# Altium PCB PCB1.PcbDoc (part 1 of 2)
Units mm, origin at the board's own origin, x right, y up, seen from the top; angles counter-clockwise.
Board outline 99.95 x 91.57 mm, 2 copper layers (Top Layer, Bottom Layer); 184 components, 220 nets, 819 pads, 143 vias.
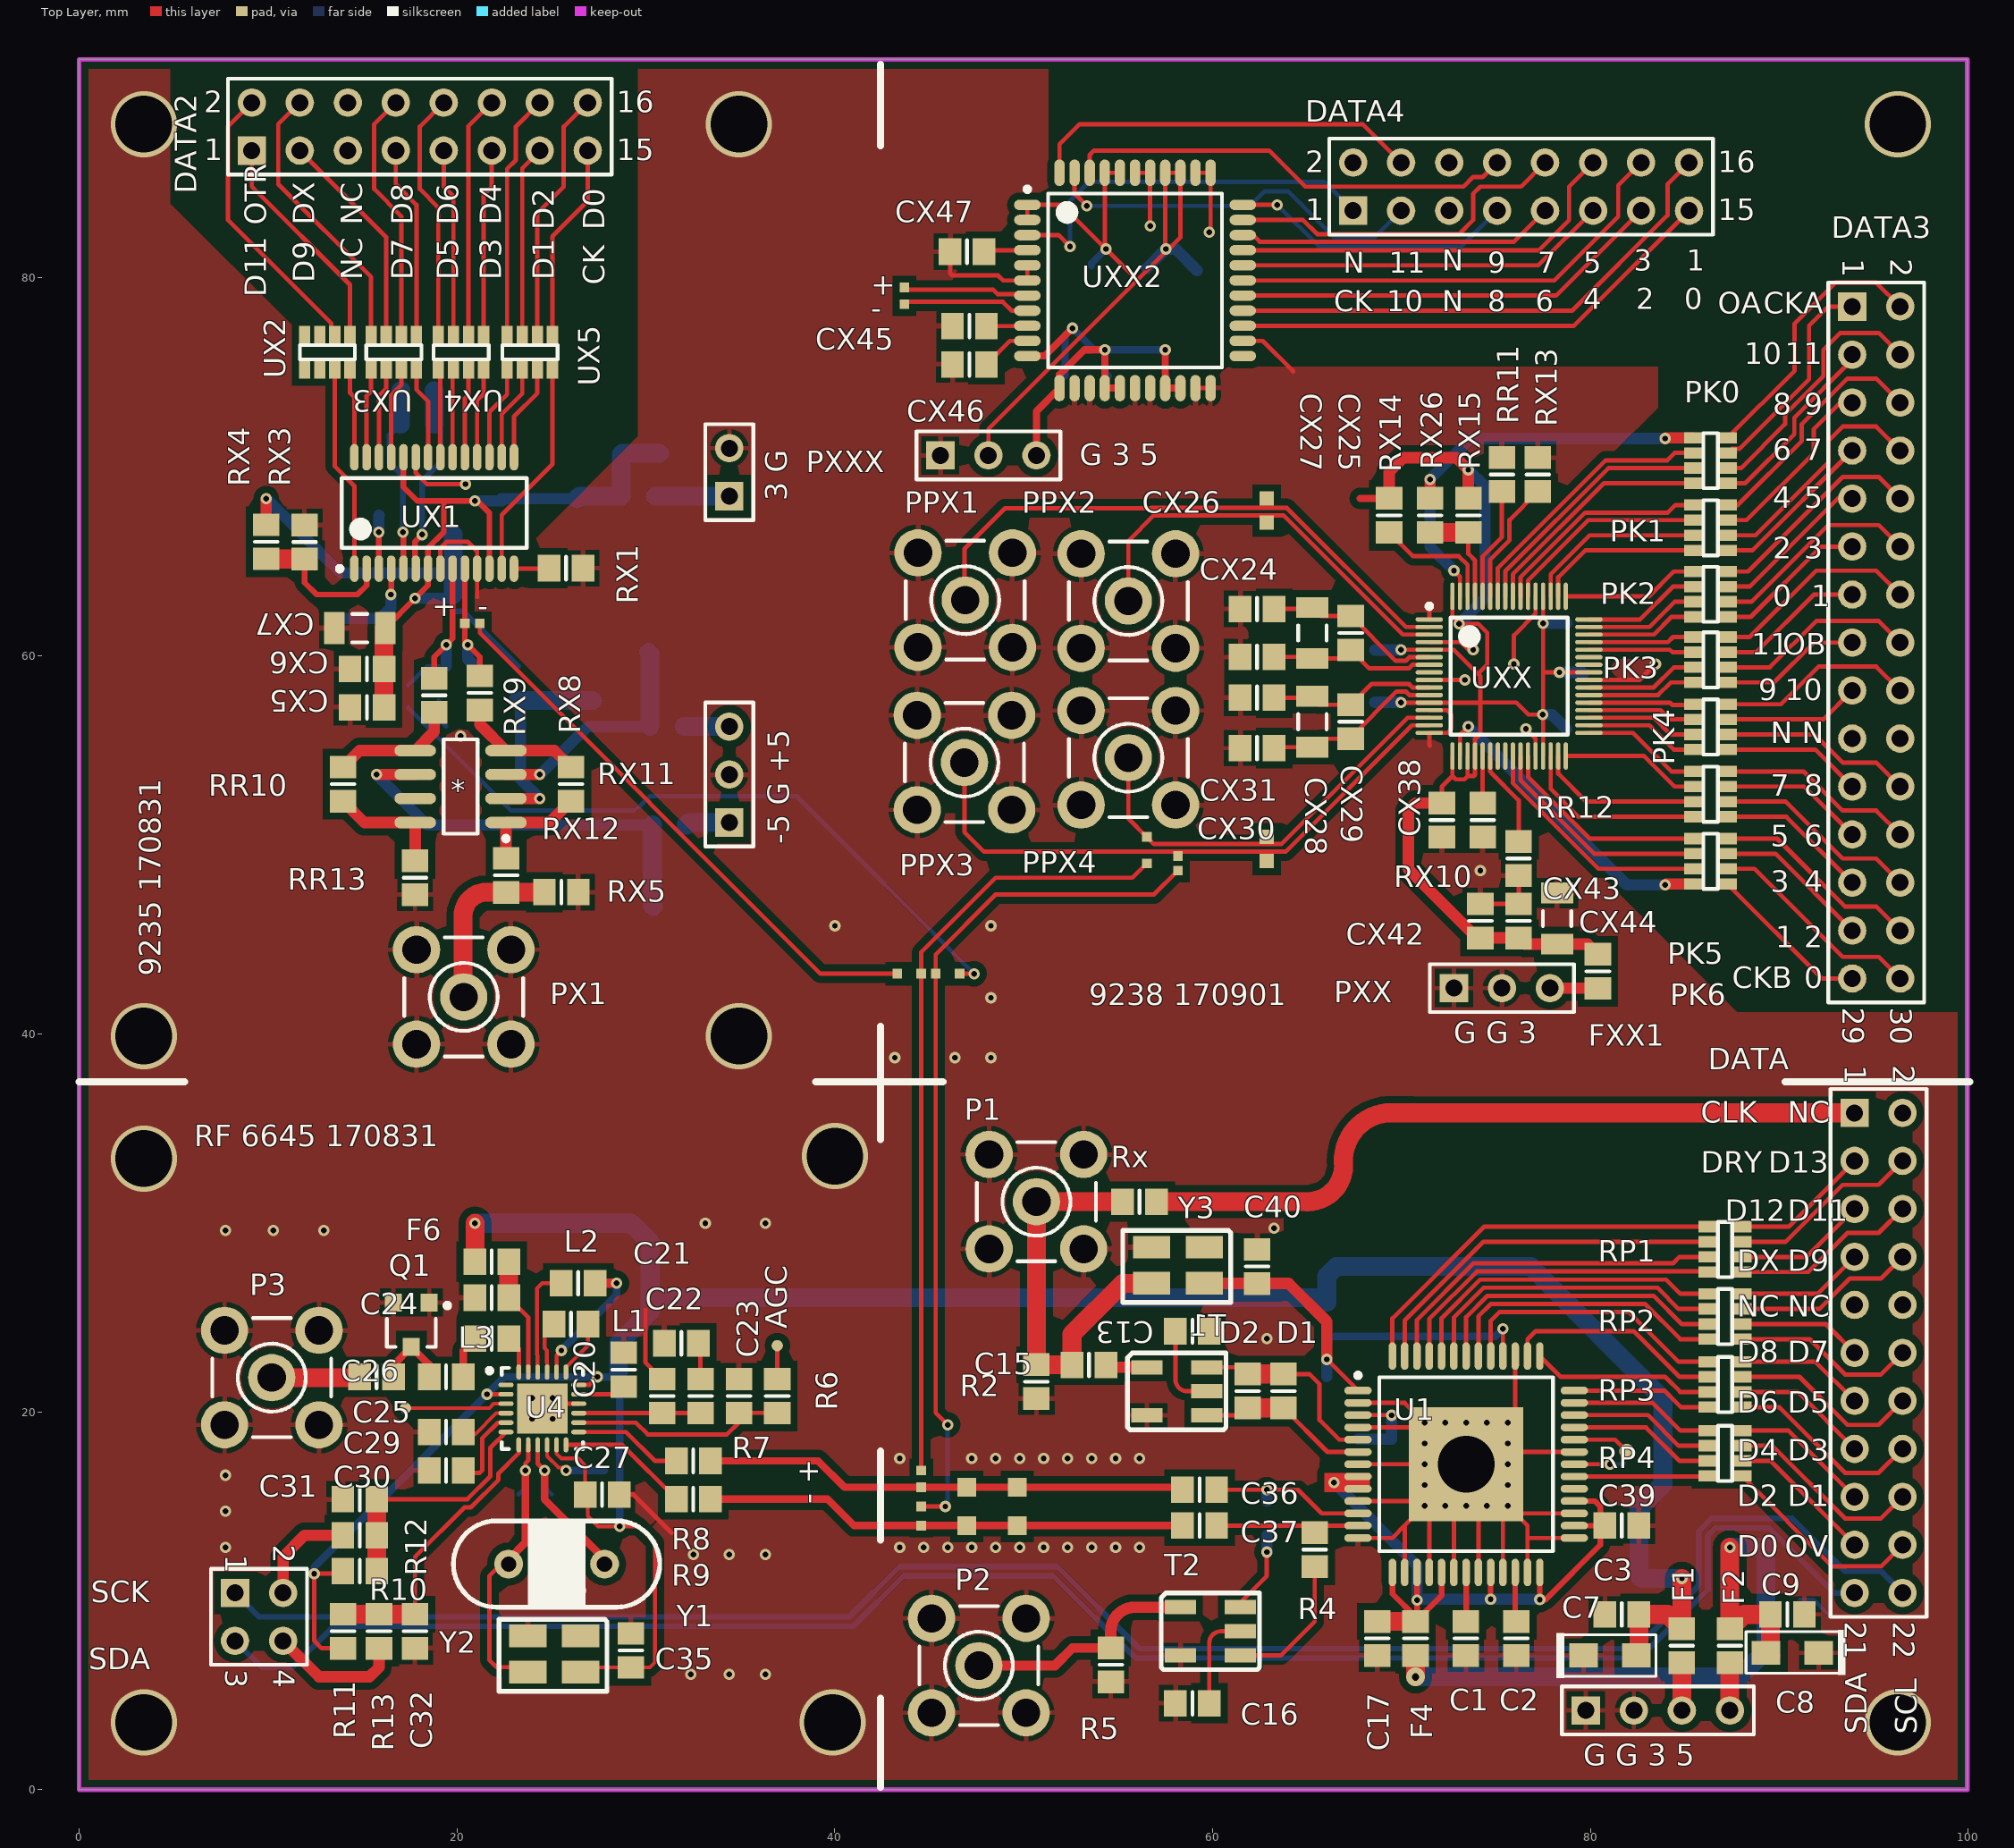
[diagram p0: Top Layer view]
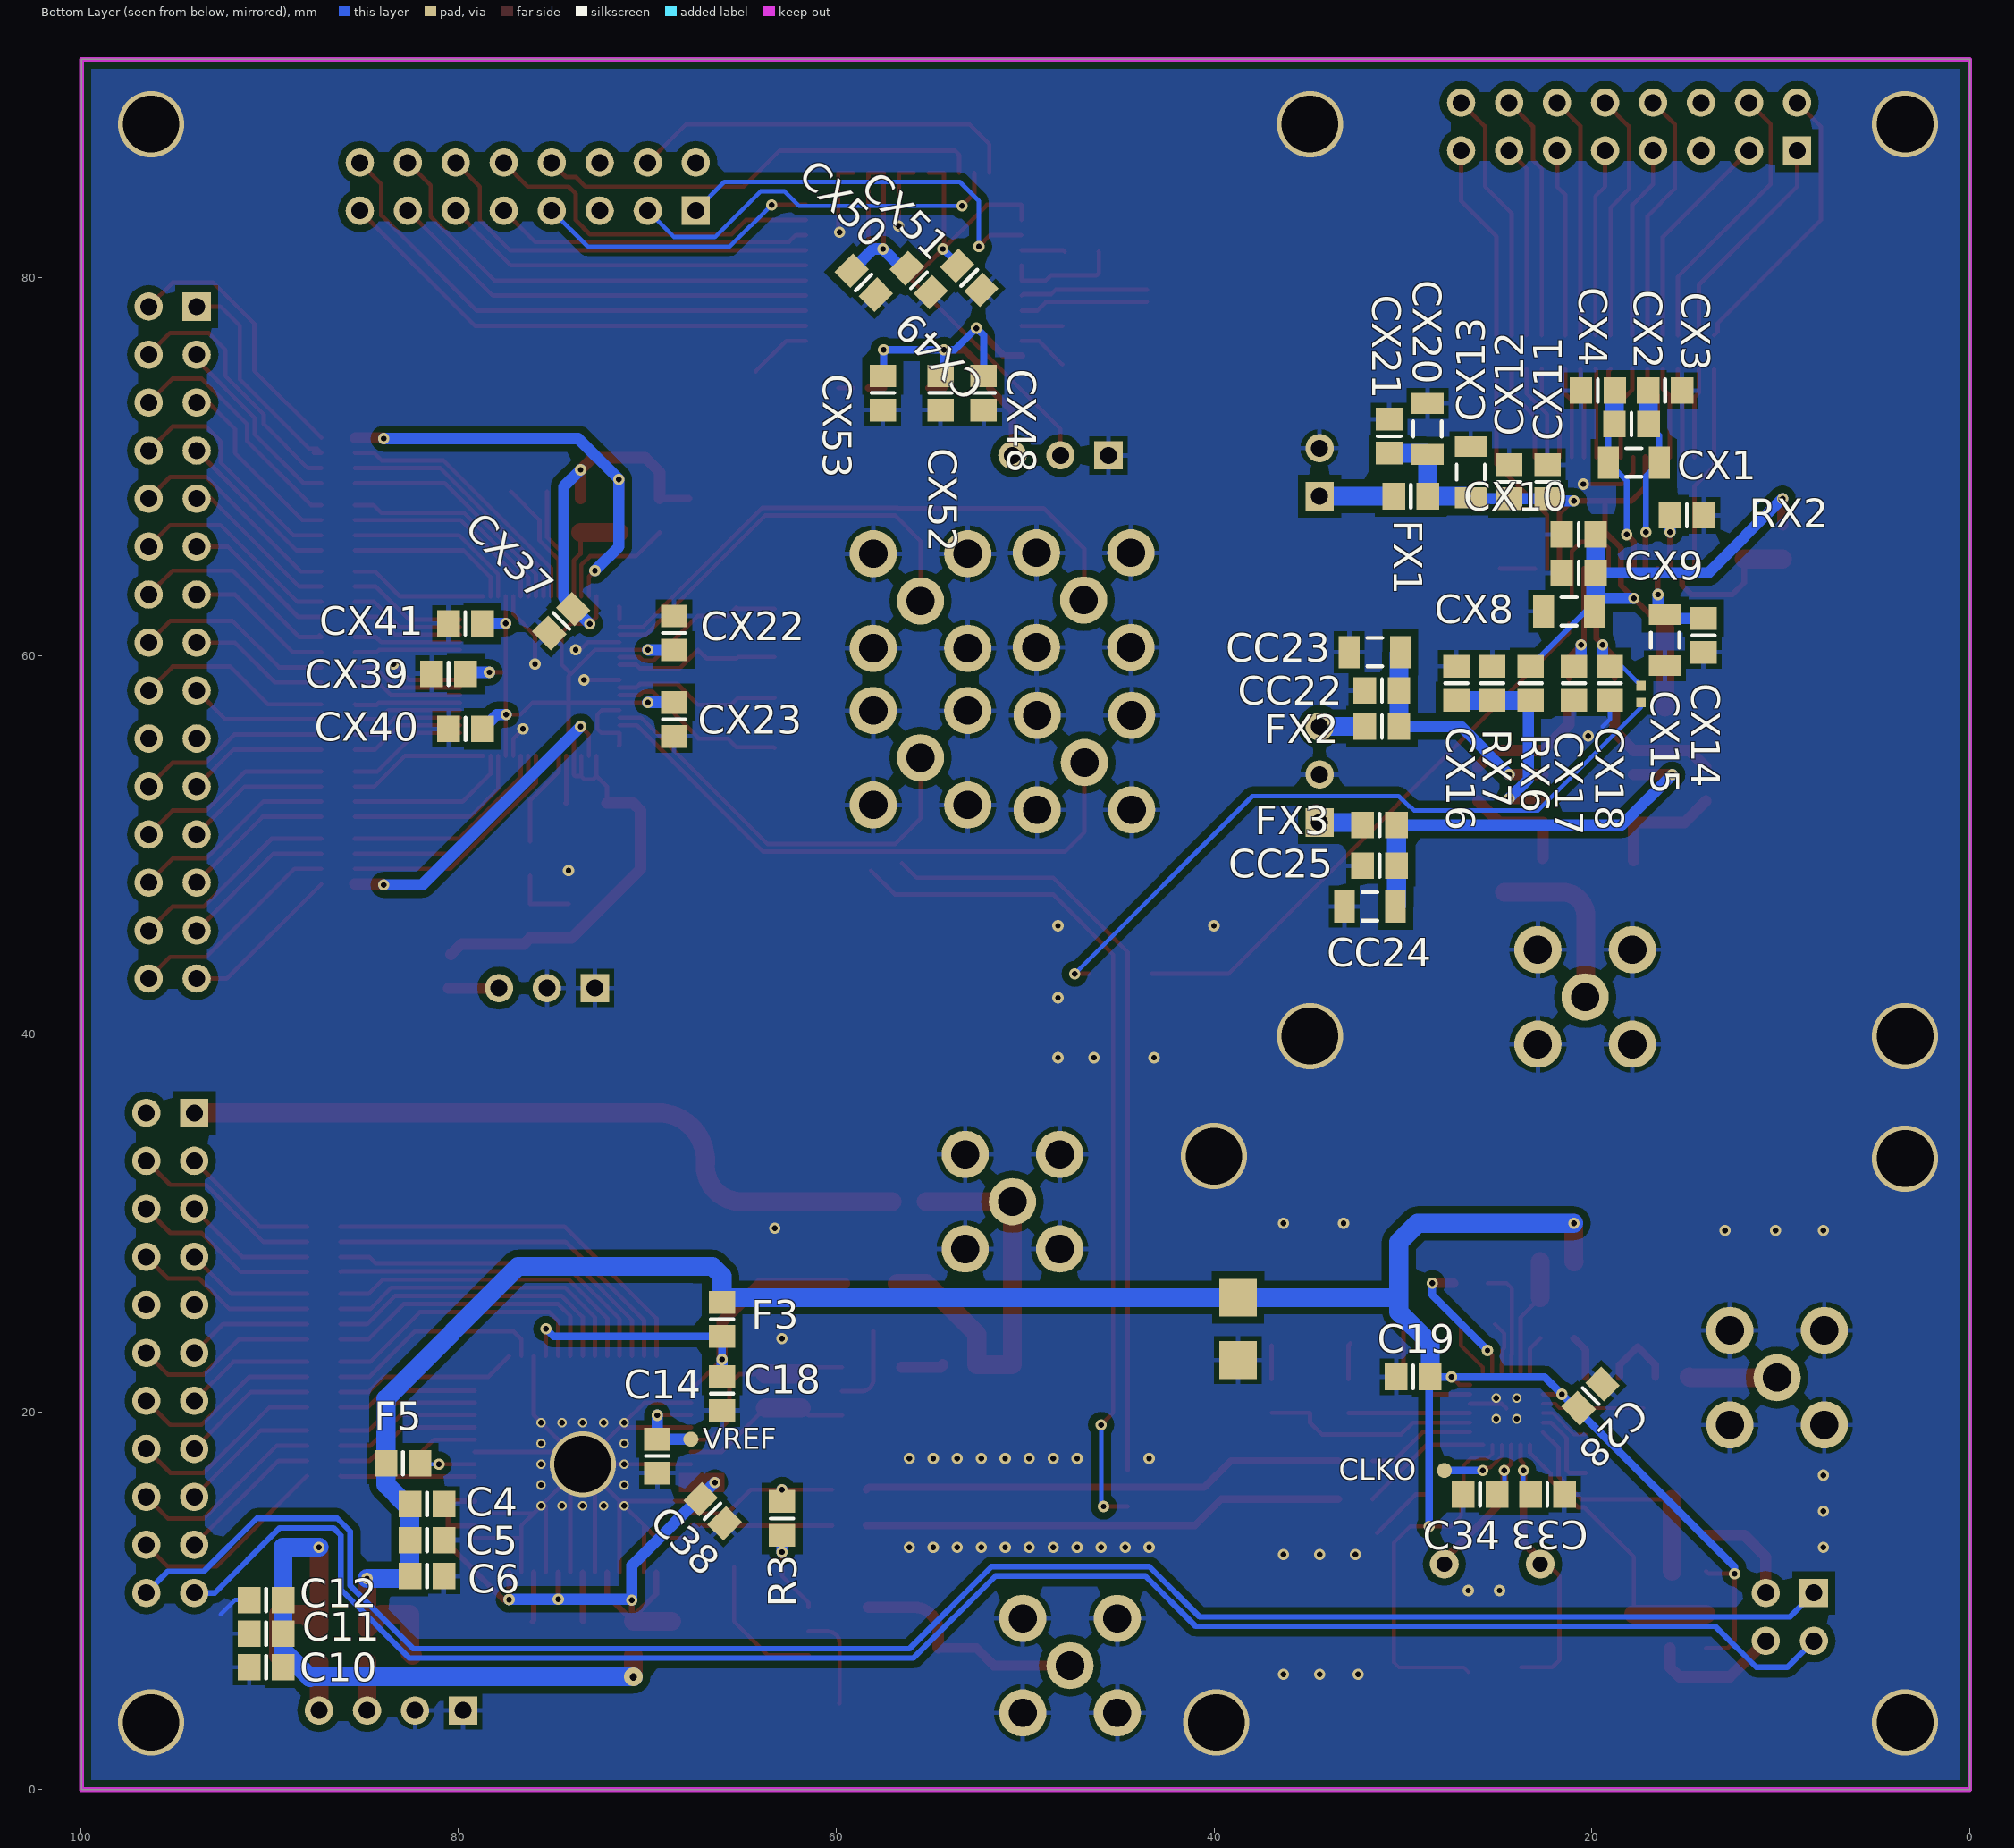
[diagram p1: Bottom Layer view, seen from below]

## Layer stack, top to bottom
Top Solder: solder mask 0.0102, Solder Resist, Dk 3.5
Top Layer: signal copper 0.0356
Dielectric1: dielectric 0.32, FR-4, Dk 4.8
Bottom Layer: signal copper 0.0356
Bottom Solder: solder mask 0.0102, Solder Resist, Dk 3.5

## Board outline
0,0 0,91.567 99.949,91.567 99.949,0

## Design rules (kind name [scope] priority, off if disabled: settings)
Clearance [All] p1: gap=0.17
PlaneConnect [All] p1: planeconnectstyle=Direct reliefexpansion=0.508 reliefentries=4 reliefconductorwidth=0.254 reliefairgap=0.254
PolygonConnect MyRule [IsVia] p1: connectstyle=Direct reliefconductorwidth=0.254 reliefentries=4 polygonreliefangle="90 Angle" airgapwidth=0.254
PolygonConnect PolygonConnect_1 [All] p2: connectstyle=Relief reliefconductorwidth=0.254 reliefentries=4 polygonreliefangle="90 Angle" airgapwidth=0.254
RoutingVias [All] p1: holewidth=0.711 width=1.27 viastyle="Through Hole" minholewidth=0.711 minwidth=1.27 maxholewidth=0.711 maxwidth=1.27
SolderMaskExpansion [All] p1: expansion=0.102
Width [All] p1: maxlimit=2 minlimit=0.17 preferedwidth=0.254 minimp=50.000000 maximp=50.000000 favimp=50.000000
29 further rules are at their usual default settings.

## Classes and differential pairs
component class Sheet1: C1 C2 C3 C4 C5 C6 C7 C8 C9 C10 C11 C12 C13 C14 C15 C16 C17 C18 C19 C20 C21 C22 C23 C24 C25 C26 C27 C28 C29 C30 C31 C32 C33 C34 C35 C36 C37 C38 C39 C40 D1 D2 DATA F1 F2 F3 F4 F5 F6 "G G 3 5" L1 L2 L3 P1 P2 P3 Q1 R2 R3 R4 R5 R6 R7 R8 R9 R10 R11 R12 R13 RP1 RP2 RP3 RP4 Rx SCK T1 T2 U1 U4 Y1 Y2 Y3
component class Sheet2: "3 G" * "-5 G +5" CC22 CC23 CC24 CC25 CX1 CX2 CX3 CX4 CX5 CX6 CX7 CX8 CX9 CX10 CX11 CX12 CX13 CX14 CX15 CX16 CX17 CX18 CX20 CX21 DATA2 FX1 FX2 FX3 PX1 RR10 RR13 RX1 RX2 RX3 RX4 RX5 RX6 RX7 RX8 RX9 RX11 RX12 UX1 UX2 UX3 UX4 UX5
component class Sheet3: CX22 CX23 CX24 CX25 CX26 CX27 CX28 CX29 CX30 CX31 CX37 CX38 CX39 CX40 CX41 CX42 CX43 CX44 CX45 CX46 CX47 CX48 CX49 CX50 CX51 CX52 CX53 DATA3 DATA4 FXX1 PK0 PK1 PK2 PK3 PK4 PK5 PK6 PPX1 PPX2 PPX3 PPX4 PXX PXXX RR11 RR12 RX10 RX13 RX14 RX15 RX26 UXX

## Components (designator, comment, footprint, x,y, rotation, side; value= is the part's Value field where it differs from the comment)
"3 G" "Header 2" HDR1X2 34.417,68.453 r90 top (schematic designator POWERX)
* "AD8138" AD8138 20.193,53.086 r180 top
"-5 G +5" "Header 3" HDR1X3 34.417,51.181 r90 top (schematic designator POWERX+-5V)
C1 "Cap" 6-0805_N 73.406,8.001 r90 top
C2 "Cap" 6-0805_N 76.073,8.001 r90 top
C3 "Cap" 6-0805_N 81.661,9.271 r0 top
C4 "Cap" 6-0805_N 81.661,15.113 r0 bottom
C5 "Cap" 6-0805_N 81.661,13.208 r0 bottom
C6 "Cap" 6-0805_N 81.661,11.303 r0 bottom
C7 "Cap" CAP-3216 81.026,7.112 r0 top
C8 "Cap" CAP-3216 90.678,7.239 r180 top
C9 "Cap" 6-0805_N 90.424,9.271 r180 top
C10 "Cap" 6-0805_N 90.17,6.477 r180 bottom
C11 "Cap" 6-0805_N 90.17,8.255 r180 bottom
C12 "Cap" 6-0805_N 90.17,10.033 r180 bottom
C13 "Cap" 6-0805_N 58.928,24.257 r180 top
C14 "Cap" 6-0805_N 69.469,17.653 r270 bottom
C15 "Cap" 6-0805_N 53.456,22.479 r180 top
C16 "Cap" 6-0805_N 58.928,4.572 r0 top
C17 "Cap" 6-0805_N 68.707,8.001 r270 top
C18 "Cap" 6-0805_N 66.04,20.955 r270 bottom
C19 "Cap" 6-0805_N 29.464,21.844 r0 bottom
C20 "Cap" 6-0805_N 28.829,22.225 r90 top
C21 "Cap" 6-0805_N 30.861,20.828 r90 top
C22 "Cap" 6-0805_N 31.877,23.622 r180 top
C23 "Cap" 6-0805_N 34.925,20.828 r90 top
C24 "Cap" 6-0805_N 21.844,26.035 r180 top
C25 "Cap" 6-0805_N 15.748,21.844 r0 top
C26 "Cap" 6-0805_N 19.431,21.844 r0 top
C27 "Cap" 6-0805_N 27.686,15.621 r0 top
C28 "Cap" 6-0805_N 20.066,20.828 r315 bottom
C29 "Cap" 6-0805_N 19.431,18.923 r0 top
C30 "Cap" 6-0805_N 19.431,16.891 r0 top
C31 "Cap" 6-0805_N 14.859,15.367 r0 top
C32 "Cap" 6-0805_N 17.78,8.382 r90 top
C33 "Cap" 6-0805_N 22.352,15.621 r0 bottom
C34 "Cap" 6-0805_N 25.919,15.621 r180 bottom
C35 "Cap" 6-0805_N 29.21,7.366 r270 top
C36 "Cap" 6-0805_N 59.309,15.875 r180 top
C37 "Cap" 6-0805_N 59.309,13.97 r180 top
C38 "Cap" 6-0805_N 66.548,14.732 r225 bottom
C39 "Cap" 6-0805_N 81.661,13.97 r0 top
C40 "Cap" 6-0805_N 62.357,27.686 r270 top
CC22 "Cap" 6-0805_N 31.115,58.166 r180 bottom
CC23 "Cap" C1206 31.496,60.198 r180 bottom
CC24 "Cap" C1206 31.75,46.736 r180 bottom
CC25 "Cap" 6-0805_N 31.242,48.895 r180 bottom
CX1 "Cap" C1206 17.78,70.231 r180 bottom
CX2 "Cap" 6-0805_N 17.907,72.263 r180 bottom
CX3 "Cap" 6-0805_N 16.129,74.041 r180 bottom
CX4 "Cap" 6-0805_N 19.685,74.041 r180 bottom
CX5 "Cap" 6-0805_N 15.24,57.277 r0 top
CX6 "Cap" 6-0805_N 15.24,59.309 r0 top
CX7 "Cap" C1206 14.859,61.468 r0 top
CX8 "Cap" C1206 21.209,62.357 r180 bottom
CX9 "Cap" 6-0805_N 20.701,64.389 r180 bottom
CX10 "Cap" 6-0805_N 20.701,66.421 r180 bottom
CX11 "Cap" 6-0805_N 22.352,69.215 r90 bottom
CX12 "Cap" 6-0805_N 24.384,69.215 r90 bottom
CX13 "Cap" C1206 26.416,69.723 r90 bottom
CX14 "Cap" 6-0805_N 14.097,61.087 r270 bottom
CX15 "Cap" C1206 16.129,60.833 r270 bottom
CX16 "Cap" 6-0805_N 27.178,58.547 r270 bottom
CX17 "Cap" 6-0805_N 20.955,58.547 r90 bottom
CX18 "Cap" 6-0805_N 19.05,58.547 r90 bottom
CX20 "Cap" C1206 28.702,72.009 r270 bottom
CX21 "Cap" 6-0805_N 30.734,71.628 r270 bottom
CX22 "Cap" 6-0805_N 68.58,61.214 r90 bottom
CX23 "Cap" 6-0805_N 68.58,56.642 r270 bottom
CX24 "Cap" 6-0805_N 62.357,59.944 r180 top
CX25 "Cap" 6-0805_N 67.31,61.214 r270 top
CX26 "Cap" 6-0805_N 62.357,62.484 r180 top
CX27 "Cap" C1206 65.278,61.214 r270 top
CX28 "Cap" C1206 65.278,56.515 r270 top
CX29 "Cap" 6-0805_N 67.31,56.515 r270 top
CX30 "Cap" 6-0805_N 62.357,55.118 r0 top
CX31 "Cap" 6-0805_N 62.357,57.785 r0 top
CX37 "Cap" 6-0805_N 74.549,61.849 r315 bottom
CX38 "Cap" 6-0805_N 72.136,51.308 r90 top
CX39 "Cap" 6-0805_N 80.518,59.055 r0 bottom
CX40 "Cap" 6-0805_N 79.618,56.134 r0 bottom
CX41 "Cap" 6-0805_N 79.629,61.722 r180 bottom
CX42 "Cap" 6-0805_N 74.168,45.974 r90 top
CX43 "Cap" 6-0805_N 76.2,45.974 r90 top
CX44 "Cap" C1206 78.232,46.101 r90 top
CX45 "Cap" 6-0805_N 47.13,77.457 r0 top
CX46 "Cap" 6-0805_N 47.13,75.425 r0 top
CX47 "Cap" 6-0805_N 47.003,81.394 r0 top
CX48 "Cap" 6-0805_N 52.197,73.914 r90 bottom
CX49 "Cap" 6-0805_N 58.547,79.756 r45 bottom
CX50 "Cap" 6-0805_N 55.626,79.883 r45 bottom
CX51 "Cap" 6-0805_N 52.959,80.01 r45 bottom
CX52 "Cap" 6-0805_N 54.483,73.914 r90 bottom
CX53 "Cap" 6-0805_N 57.531,73.914 r90 bottom
D1 "Diode 1N4148" 6-0805_N 63.754,21.093 r270 top
D2 "Diode 1N4148" 6-0805_N 61.849,21.093 r90 top
DATA "Header 11X2" HDR2X11 93.98,35.814 r270 top
DATA2 "Header 8X2" HDR2X8 9.144,86.741 r0 top
DATA3 "Header 15X2" HDR2X15 93.853,78.486 r270 top
DATA4 "Header 8X2" HDR2X8 67.437,83.566 r0 top (schematic designator DAT)
F1 "Fuse 1" 6-0805_N 84.836,7.62 r90 top
F2 "Fuse 1" 6-0805_N 87.376,7.62 r90 top
F3 "Fuse 1" 6-0805_N 66.04,24.892 r90 bottom
F4 "Fuse 1" 6-0805_N 70.739,8.001 r90 top
F5 "Fuse 1" 6-0805_N 82.931,17.272 r0 bottom
F6 "Fuse 1" 6-0805_N 21.844,27.94 r0 top
FX1 "Fuse 1" 6-0805_N 29.591,68.453 r0 bottom
FX2 "Fuse 1" 6-0805_N 31.115,56.261 r180 bottom
FX3 "Fuse 1" 6-0805_N 31.242,51.054 r0 bottom
FXX1 "Fuse 1" 6-0805_N 80.391,43.307 r270 top
"G G 3 5" "Header 4" HDR1X4 79.756,4.191 r0 top (schematic designator POWER)
L1 "Inductor" 6-0805_N 26.035,24.638 r0 top
L2 "Inductor" 6-0805_N 26.416,26.797 r0 top
L3 "Inductor" 6-0805_N 21.844,23.876 r0 top
P1 "SMB" SMB_V-RJ45 50.673,31.115 r0 top
P2 "SMB" SMB_V-RJ45 47.625,6.564 r0 top
P3 "SMB" SMB_V-RJ45 10.2,21.804 r0 top
PK0 "RES_PACK4_0603" 8P4R_0603 85.471,71.539 r0 top
PK1 "RES_PACK4_0603" 8P4R_0603 85.471,67.983 r0 top
PK2 "RES_PACK4_0603" 8P4R_0603 85.471,64.465 r0 top
PK3 "RES_PACK4_0603" 8P4R_0603 85.471,60.998 r0 top
PK4 "RES_PACK4_0603" 8P4R_0603 85.471,57.442 r0 top
PK5 "RES_PACK4_0603" 8P4R_0603 85.471,53.886 r0 top
PK6 "RES_PACK4_0603" 8P4R_0603 85.471,50.33 r0 top
PPX1 "SMB" SMB_V-RJ45 46.903,62.952 r0 top
PPX2 "SMB" SMB_V-RJ45 55.539,62.905 r0 top
PPX3 "SMB" SMB_V-RJ45 46.863,54.356 r0 top
PPX4 "SMB" SMB_V-RJ45 55.539,54.61 r0 top
PX1 "SMB" SMB_V-RJ45 20.36,41.95 r90 top
PXX "Header 3" HDR1X3 72.771,42.418 r0 top
PXXX "Header 3" HDR1X3 45.593,70.612 r0 top
Q1 "BAV99LT1__A7" SOT23-3 17.587,24.606 r180 top
R2 "Res1" 6-0805_N 50.673,21.59 r90 top
R3 "Res1" 6-0805_N 62.865,14.351 r90 bottom
R4 "Res1" 6-0805_N 65.405,12.7 r90 top
R5 "Res1" 6-0805_N 54.61,6.604 r90 top
R6 "Res1" 6-0805_N 36.957,20.828 r90 top
R7 "Res1" 6-0805_N 32.893,20.828 r90 top
R8 "Res1" 6-0805_N 32.512,17.399 r0 top
R9 "Res1" 6-0805_N 32.512,15.367 r0 top
R10 "Res1" 6-0805_N 14.859,11.557 r180 top
R11 "Res1" 6-0805_N 13.97,8.382 r270 top
R12 "Res1" 6-0805_N 14.859,13.462 r180 top
R13 "Res1" 6-0805_N 15.875,8.382 r270 top
RP1 "RES_PACK4_0603" 8P4R_0603 86.233,29.794 r0 top
RP2 "RES_PACK4_0603" 8P4R_0603 86.233,26.238 r0 top
RP3 "RES_PACK4_0603" 8P4R_0603 86.233,22.644 r0 top
RP4 "RES_PACK4_0603" 8P4R_0603 86.233,18.999 r0 top
RR10 "Res1" 6-0805_N 13.97,53.213 r270 top
RR11 "Res1" 6-0805_N 75.311,69.596 r90 top
RR12 "Res1" 6-0805_N 76.2,49.276 r90 top
RR13 "Res1" 6-0805_N 17.78,48.26 r270 top
Rx "Res1" 6-0805_N 56.134,31.115 r0 top
RX1 "Res1" 6-0805_N 25.781,64.643 r180 top
RX2 "Res1" 6-0805_N 14.975,67.437 r180 bottom
RX3 "Res1" 6-0805_N 11.938,66.029 r270 top
RX4 "Res1" 6-0805_N 9.906,66.04 r90 top
RX5 "Res1" 6-0805_N 25.527,47.498 r180 top
RX6 "Res1" 6-0805_N 23.241,58.547 r90 bottom
RX7 "Res1" 6-0805_N 25.273,58.547 r270 bottom
RX8 "Res1" 6-0805_N 21.209,58.039 r270 top
RX9 "Res1" 6-0805_N 18.796,57.912 r270 top
RX10 "Res1" 6-0805_N 74.295,51.308 r90 top
RX11 "Res1" 6-0805_N 26.035,53.213 r270 top
RX12 "Res1" 6-0805_N 22.606,48.387 r270 top
RX13 "Res1" 6-0805_N 77.216,69.596 r90 top
RX14 "Res1" 6-0805_N 69.342,67.437 r90 top
RX15 "Res1" 6-0805_N 73.533,67.437 r90 top
RX26 "Res1" 6-0805_N 71.501,67.437 r90 top
SCK "Header 2X2" HDR2X2 8.255,10.414 r270 top (schematic designator IIC)
T1 "1:4" T2 57.912,26.035 r270 top
T2 "1:4" TC4-1W+ 59.69,13.335 r270 top
U1 "AD6645" AD6645 73.416,17.22 r0 top
U4 "R820T" R820T 24.523,20.173 r0 top
UX1 "AD9235" AD9235 18.796,67.564 r90 top
UX2 "RES_PACK4_0603" 8P4R_0603 11.938,75.184 r90 top
UX3 "RES_PACK4_0603" 8P4R_0603 15.456,75.184 r90 top
UX4 "RES_PACK4_0603" 8P4R_0603 19.012,75.184 r90 top
UX5 "RES_PACK4_0603" 8P4R_0603 22.657,75.184 r90 top
UXX "AD9238" AD9238 75.692,58.928 r0 top
UXX2 "AD6640" TQFP80P1200X1200X160-44N 55.893,79.87 r0 top
Y1 "XTAL" X-HC-49S 25.273,11.938 r180 top
Y2 "XATLS" XTAL4PIN#1 26.543,8.128 r180 top
Y3 "XATLS" XTAL4PIN#2 59.563,28.702 r180 top

## Footprints (in the part's own frame and the unit in brackets; to place one, negate y for a bottom-side part, rotate by r counter-clockwise, add the part's x,y. Pads: shape width x height; smd on the part's side, far side on the other; paste and mask are expansions set on the pad)
6-0805_N [mm] "Chip Resistor, Body 2.0x1.2mm, IPC Medium Density"
  rect 1.2x1.4 smd: 1(-0.9,0) 2(0.9,0)
  silkscreen extent 0,-0.6 0,0.6, body extent -1.07,-0.7 1.07,0.7, height 0.7
8P4R_0603 [mm]
  rect 1.016x0.6 smd: 1(0,0) 2(1.778,0) 3(0,-0.8) 4(1.778,-0.8) 5(0,-1.6) 6(1.778,-1.6) 7(0,-2.4) 8(1.778,-2.4)
  silkscreen extent 0.51,-2.67 1.27,0.25
AD6645 [mm] "TQFP, 52-Leads, Body 10.00x10.00mm, Pitch 0.65mm, Thermal Pad 6.05x6.05mm, IPC Medium Density"
  oval 1.45x0.4 smd: 1(-5.725,3.9) 2(-5.725,3.25) 3(-5.725,2.6) 4(-5.725,1.95) 5(-5.725,1.3) 6(-5.725,0.65) 7(-5.725,0) 8(-5.725,-0.65) 9(-5.725,-1.3) 10(-5.725,-1.95) 11(-5.725,-2.6) 12(-5.725,-3.25) 13(-5.725,-3.9) 27(5.725,-3.9) 28(5.725,-3.25) 29(5.725,-2.6) 30(5.725,-1.95) 31(5.725,-1.3) 32(5.725,-0.65) 33(5.725,0) 34(5.725,0.65) 35(5.725,1.3) 36(5.725,1.95) 37(5.725,2.6) 38(5.725,3.25) 39(5.725,3.9)
  oval 0.4x1.45 smd: 14(-3.9,-5.725) 15(-3.25,-5.725) 16(-2.6,-5.725) 17(-1.95,-5.725) 18(-1.3,-5.725) 19(-0.65,-5.725) 20(0,-5.725) 21(0.65,-5.725) 22(1.3,-5.725) 23(1.95,-5.725) 24(2.6,-5.725) 25(3.25,-5.725) 26(3.9,-5.725) 40(3.9,5.725) 41(3.25,5.725) 42(2.6,5.725) 43(1.95,5.725) 44(1.3,5.725) 45(0.65,5.725) 46(0,5.725) 47(-0.65,5.725) 48(-1.3,5.725) 49(-1.95,5.725) 50(-2.6,5.725) 51(-3.25,5.725) 52(-3.9,5.725)
  rect 6.05x6.05 smd: 53(0,0)
  silkscreen extent -5.85,-4.6 4.6,4.82, body extent -5,-5 5,5, height 1.6
AD8138 [mm] "SOIC, 8-Leads, Body 4.90x3.90mm, Pitch 1.27mm, IPC Medium Density"
  oval 2.2x0.6 smd: 1(-2.4,1.905) 2(-2.4,0.635) 3(-2.4,-0.635) 4(-2.4,-1.905) 5(2.4,-1.905) 6(2.4,-0.635) 7(2.4,0.635) 8(2.4,1.905)
  silkscreen extent -2.53,-2.5 0.9,2.88, body extent -2,-2.5 2,2.5, height 1.7
AD9235 [mm] "TSOP, 28-Leads, Body 9.70x4.40mm, Pitch 0.65mm, IPC Medium Density"
  oval 1.4x0.45 smd: 1(-2.95,4.225) 2(-2.95,3.575) 3(-2.95,2.925) 4(-2.95,2.275) 5(-2.95,1.625) 6(-2.95,0.975) 7(-2.95,0.325) 8(-2.95,-0.325) 9(-2.95,-0.975) 10(-2.95,-1.625) 11(-2.95,-2.275) 12(-2.95,-2.925) 13(-2.95,-3.575) 14(-2.95,-4.225) 15(2.95,-4.225) 16(2.95,-3.575) 17(2.95,-2.925) 18(2.95,-2.275) 19(2.95,-1.625) 20(2.95,-0.975) 21(2.95,-0.325) 22(2.95,0.325) 23(2.95,0.975) 24(2.95,1.625) 25(2.95,2.275) 26(2.95,2.925) 27(2.95,3.575) 28(2.95,4.225)
  silkscreen extent -3.07,-4.9 1.85,5.12, body extent -2.25,-4.9 2.25,4.9, height 1.2
AD9238 [mm] "TSQFP, 64-Leads, Body 7.00x7.00mm, Pitch 0.40mm, IPC Medium Density"
  oval 1.45x0.229 smd: 1(-4.225,3) 2(-4.225,2.6) 3(-4.225,2.2) 4(-4.225,1.8) 5(-4.225,1.4) 6(-4.225,1) 7(-4.225,0.6) 8(-4.225,0.2) 9(-4.225,-0.2) 10(-4.225,-0.6) 11(-4.225,-1) 12(-4.225,-1.4) 13(-4.225,-1.8) 14(-4.225,-2.2) 15(-4.225,-2.6) 16(-4.225,-3) 33(4.225,-3) 34(4.225,-2.6) 35(4.225,-2.2) 36(4.225,-1.8) 37(4.225,-1.4) 38(4.225,-1) 39(4.225,-0.6) 40(4.225,-0.2) 41(4.225,0.2) 42(4.225,0.6) 43(4.225,1) 44(4.225,1.4) 45(4.225,1.8) 46(4.225,2.2) 47(4.225,2.6) 48(4.225,3)
  oval 0.229x1.45 smd: 17(-3,-4.225) 18(-2.6,-4.225) 19(-2.2,-4.225) 20(-1.8,-4.225) 21(-1.4,-4.225) 22(-1,-4.225) 23(-0.6,-4.225) 24(-0.2,-4.225) 25(0.2,-4.225) 26(0.6,-4.225) 27(1,-4.225) 28(1.4,-4.225) 29(1.8,-4.225) 30(2.2,-4.225) 31(2.6,-4.225) 32(3,-4.225) 49(3,4.225) 50(2.6,4.225) 51(2.2,4.225) 52(1.8,4.225) 53(1.4,4.225) 54(1,4.225) 55(0.6,4.225) 56(0.2,4.225) 57(-0.2,4.225) 58(-0.6,4.225) 59(-1,4.225) 60(-1.4,4.225) 61(-1.8,4.225) 62(-2.2,4.225) 63(-2.6,4.225) 64(-3,4.225)
  silkscreen extent -4.35,-3.1 3.1,3.82, body extent -3.5,-3.5 3.5,3.5, height 1.6
C1206 [mm] "Chip Capacitor, Body 3.2x1.6mm, IPC High Density"
  rect 1.1x1.7 smd: 1(-1.35,0) 2(1.35,0)
  silkscreen extent -0.4,-0.75 0.4,0.75, body extent -1.7,-0.9 1.7,0.9, height 1.3
CAP-3216 [mil] "钽电容"
  rect 60x50 smd: 1(-55,0) 2(55,0)
  silkscreen extent -111,-48 96,46, body extent -63,-32 63,31, height 63
HDR1X2 [mm] "Connector; Header; 2 Position"
  rect 1.5x1.5 hole 0.9: 1(0,0)
  round 1.5 hole 0.9: 2(2.54,0)
  silkscreen extent -1.27,-1.27 3.81,1.27
HDR1X3 [mm] "Connector; Header; 3 Position"
  rect 1.5x1.5 hole 0.9: 1(0,0)
  round 1.5 hole 0.9: 2(2.54,0) 3(5.08,0)
  silkscreen extent -1.27,-1.27 6.35,1.27
HDR1X4 [mm] "Connector; Header; 4 Position"
  rect 1.5x1.5 hole 0.9: 1(0,0)
  round 1.5 hole 0.9: 2(2.54,0) 3(5.08,0) 4(7.62,0)
  silkscreen extent -1.27,-1.27 8.89,1.27
HDR2X2 [mm] "Connector; Header; 2x2 Position"
  rect 1.5x1.5 hole 0.9: 1(0,0)
  round 1.5 hole 0.9: 2(0,2.54) 3(2.54,0) 4(2.54,2.54)
  silkscreen extent -1.27,-1.27 3.81,3.81
HDR2X8 [mm] "Connector; Header; 8x2 Position"
  rect 1.5x1.5 hole 0.9: 1(0,0)
  round 1.5 hole 0.9: 2(0,2.54) 3(2.54,0) 4(2.54,2.54) 5(5.08,0) 6(5.08,2.54) 7(7.62,0) 8(7.62,2.54) 9(10.16,0) 10(10.16,2.54) 11(12.7,0) 12(12.7,2.54) 13(15.24,0) 14(15.24,2.54) 15(17.78,0) 16(17.78,2.54)
  silkscreen extent -1.27,-1.27 19.05,3.81
HDR2X11 [mm] "Connector; Header; 11x2 Position"
  rect 1.5x1.5 hole 0.9: 1(0,0)
  round 1.5 hole 0.9: 2(0,2.54) 3(2.54,0) 4(2.54,2.54) 5(5.08,0) 6(5.08,2.54) 7(7.62,0) 8(7.62,2.54) 9(10.16,0) 10(10.16,2.54) 11(12.7,0) 12(12.7,2.54) 13(15.24,0) 14(15.24,2.54) 15(17.78,0) 16(17.78,2.54) 17(20.32,0) 18(20.32,2.54) 19(22.86,0) 20(22.86,2.54) 21(25.4,0) 22(25.4,2.54)
  silkscreen extent -1.27,-1.27 26.67,3.81
HDR2X15 [mm] "Connector; Header; 15x2 Position"
  rect 1.5x1.5 hole 0.9: 1(0,0)
  round 1.5 hole 0.9: 2(0,2.54) 3(2.54,0) 4(2.54,2.54) 5(5.08,0) 6(5.08,2.54) 7(7.62,0) 8(7.62,2.54) 9(10.16,0) 10(10.16,2.54) 11(12.7,0) 12(12.7,2.54) 13(15.24,0) 14(15.24,2.54) 15(17.78,0) 16(17.78,2.54) 17(20.32,0) 18(20.32,2.54) 19(22.86,0) 20(22.86,2.54) 21(25.4,0) 22(25.4,2.54) 23(27.94,0) 24(27.94,2.54) 25(30.48,0) 26(30.48,2.54) 27(33.02,0) 28(33.02,2.54) 29(35.56,0) 30(35.56,2.54)
  silkscreen extent -1.27,-1.27 36.83,3.81
R820T [mm] "QFN, 24-Leads, Body 4.00x4.00mm, Pitch 0.50mm, Thermal Pad 2.68x2.68mm, IPC Medium Density"
  oval 0.8x0.25 smd: 1(-1.925,1.25) 2(-1.925,0.75) 3(-1.925,0.25) 4(-1.925,-0.25) 5(-1.925,-0.75) 6(-1.925,-1.25) 13(1.925,-1.25) 14(1.925,-0.75) 15(1.925,-0.25) 16(1.925,0.25) 17(1.925,0.75) 18(1.925,1.25)
  oval 0.25x0.8 smd: 7(-1.25,-1.925) 8(-0.75,-1.925) 9(-0.25,-1.925) 10(0.25,-1.925) 11(0.75,-1.925) 12(1.25,-1.925) 19(1.25,1.925) 20(0.75,1.925) 21(0.25,1.925) 22(-0.25,1.925) 23(-0.75,1.925) 24(-1.25,1.925)
  rect 2.65x2.65 smd: 25(0,0)
  silkscreen extent -2.92,-2.15 2.15,2.15, body extent -2,-2 2,2, height 0.9
SMB_V-RJ45 [mm] "Connector; SMB Straight"
  round 2.5 hole 1.5: 1(0,0) 2(-2.5,-2.5) 2(-2.5,2.5) 2(2.5,-2.5) 2(2.5,2.5)
  silkscreen extent -3.15,-3.15 3.15,3.15
SOT23-3 [mm]
  rect 0.9x0.95 smd: 1(-0.95,-1.175) 2(0.95,-1.175) 3(0,1.175)
  silkscreen extent -2.03,-1.14 1.3,1.18, body extent -1.45,-1.4 1.45,1.4, height 1.2
T2 [mm]
  rect 0.76x1.65 smd: 1(3.683,-1.397) 2(6.223,-1.397) 3(3.683,1.783) 4(4.953,1.783) 5(6.223,1.783)
  silkscreen extent 2.92,-2.41 6.98,2.79
TC4-1W+ [mm]
  rect 0.76x1.65 smd: 1(3.683,-1.397) 2(6.223,-1.397) 3(3.683,1.783) 4(4.953,1.783) 5(6.223,1.783)
  silkscreen extent 2.92,-2.41 6.98,2.79
TQFP80P1200X1200X160-44N [mm] "TQFP, 44-Leads, Body 10.00x10.00mm, Pitch 0.80mm, IPC Medium Density"
  oval 1.4x0.55 smd: 1(-5.7,4) 2(-5.7,3.2) 3(-5.7,2.4) 4(-5.7,1.6) 5(-5.7,0.8) 6(-5.7,0) 7(-5.7,-0.8) 8(-5.7,-1.6) 9(-5.7,-2.4) 10(-5.7,-3.2) 11(-5.7,-4) 23(5.7,-4) 24(5.7,-3.2) 25(5.7,-2.4) 26(5.7,-1.6) 27(5.7,-0.8) 28(5.7,0) 29(5.7,0.8) 30(5.7,1.6) 31(5.7,2.4) 32(5.7,3.2) 33(5.7,4)
  oval 0.55x1.4 smd: 12(-4,-5.7) 13(-3.2,-5.7) 14(-2.4,-5.7) 15(-1.6,-5.7) 16(-0.8,-5.7) 17(0,-5.7) 18(0.8,-5.7) 19(1.6,-5.7) 20(2.4,-5.7) 21(3.2,-5.7) 22(4,-5.7) 34(4,5.7) 35(3.2,5.7) 36(2.4,5.7) 37(1.6,5.7) 38(0.8,5.7) 39(0,5.7) 40(-0.8,5.7) 41(-1.6,5.7) 42(-2.4,5.7) 43(-3.2,5.7) 44(-4,5.7)
  silkscreen extent -5.82,-4.6 4.6,4.95, body extent -5,-5 5,5, height 1.6
X-HC-49S [mil] "插件晶振"
  round 60 hole 32: 1(-100,0) 2(100,0)
  silkscreen extent -215,-90 215,90
XTAL4PIN#1 [mm]
  rect 2x1.2 smd: 1(0,0) 2(2.794,0) 3(2.794,1.905) 4(0,1.905)
  silkscreen extent -1.4,-0.89 4.32,2.92
XTAL4PIN#2 [mm]
  rect 1.981x1.194 smd: 1(0,0) 2(2.794,0) 3(2.794,1.905) 4(0,1.905)
  silkscreen extent -1.4,-0.89 4.32,2.92

## Part data
"3 G": "Header, 2-Pin"
"-5 G +5" PXX PXXX: "Header, 3-Pin"
C1 C2 C3 C4 C5 C6 C7 C8 C9 C10 C11 C12 C13 C14 C15 C16 C17 C18 C19 C20 C21 C22 C23 C24 C25 C26 C27 C28 C29 C30 C31 C32 C33 C34 C35 C36 C37 C38 C39 C40 CC22 CC23 CC24 CC25 CX1 CX2 CX3 CX4 CX5 CX6 CX7 CX8 CX9 CX10 CX11 CX12 CX13 CX14 CX15 CX16 CX17 CX18 CX20 CX21 CX22 CX23 CX24 CX25 CX26 CX27 CX28 CX29 CX30 CX31 CX37 CX38 CX39 CX40 CX41 CX42 CX43 CX44 CX45 CX46 CX47 CX48 CX49 CX50 CX51 CX52 CX53: "Capacitor"
D1 D2: "High Conductance Fast Diode"
DATA: "Header, 11-Pin, Dual row"
DATA2 DATA4: "Header, 8-Pin, Dual row"
DATA3: "Header, 15-Pin, Dual row"
F1 F2 F3 F4 F5 F6 FX1 FX2 FX3 FXX1: "Fuse"
"G G 3 5": "Header, 4-Pin"
P1 P2 P3 PPX1 PPX2 PPX3 PPX4 PX1: "SMB Straight Connector"
Q1: library part NPN1, "贴片三极管"
R2 R3 R4 R5 R6 R7 R8 R9 R10 R11 R12 R13 RR10 RR11 RR12 RR13 Rx RX1 RX2 RX3 RX4 RX5 RX6 RX7 RX8 RX9 RX10 RX11 RX12 RX13 RX14 RX15 RX26: "Resistor"
SCK: "Header, 2-Pin, Dual row"
T1 T2: library part "Trans CT Ideal", "Center-Tapped Transformer (Ideal)"
Y1: "晶振"
Y2 Y3: "贴片有源晶振"

## Free pads (board coordinates)
  round 0.6 smd: 2(17.272,20.193) 13(36.957,23.495)
  round 0.8 smd far side: 4(27.813,16.891) 11(67.691,18.542)
  rect 1x1 smd: 7(46.99,13.97) 7(46.99,16.002) 7(49.657,16.002) 8(49.657,13.97)
  round 0.8 smd: 10(81.915,17.907)
  rect 0.762x0.762 smd: 14(62.865,67.056) 15(62.865,68.326) 16(62.865,50.419) 17(62.865,49.149)
  rect 0.508x0.508 smd: 26(58.166,49.403) 30(44.577,16.891) 31(44.577,16.002) 32(44.577,13.97) 33(44.577,14.986) 34(44.577,43.18) 35(43.307,43.18) 36(21.209,61.722) 37(20.421,61.722) 39(46.609,43.18) 40(45.339,43.18) 41(43.688,79.502) 42(43.688,78.613) 70(58.166,48.641) 71(56.515,50.419) 72(56.515,49.022)
  rect 0.508x0.508 smd far side: 38(17.399,58.42) 69(17.399,57.531)
  rect 2x2 smd far side: 84(38.735,26.035) 85(38.735,22.733)

## Via types
v1: diameter 0.6, hole 0.3, Top Layer to Bottom Layer, 111 vias
v2: diameter 0.5, hole 0.3, Top Layer to Bottom Layer, 20 vias
v3: diameter 3.5, hole 3, Top Layer to Bottom Layer, 11 vias
v4: diameter 1, hole 0.4, Top Layer to Bottom Layer, 1 vias

## Nets (pads, with @x,y where several pads share a name; then routed paths per layer and width w, separated by ;. In a path a pad name is that pad's centre, name@x,y a point inside that pad or via, vN(x,y) a via of type N, cw(c..) or ccw(c..) an arc to the next point about the centre after c; other vN are vias at no path point)
3V3: C3.2 C4.2 C5.2 C6.2 C7.2 C19.1 C27.1 C28.2 C35.2 F1.2 F3.2 F5.2 F6.1 pad.84 R10.2 R11.2 U4.2 U4.11 U4.18 Y2.4 | length 154.8
  Top Layer w0.2: U4.11@25.273,18.248 25.273,17.78 25.527,17.526 26.416,17.526 26.786,17.156 C27.1@26.786,15.621 26.924,15.483 26.924,14.478 27.47,13.932 v1(28.613,13.932) 29.629,13.932 30.48,13.081 30.48,6.731 30.215,6.466 C35.2@29.21,6.466 26.786,6.466 Y2.4@26.543,6.223
  Top Layer w0.23: R10.2@13.959,11.557 13.832,11.43 v1(12.446,11.43) 12.446,7.874 12.838,7.482 R11.2@13.97,7.482 ; v1(21.59,20.923) U4.2@22.598,20.923 ; U4.18@26.448,21.423 27.011,21.423 v1(27.432,21.844)
  Top Layer w1: F6.1@20.944,27.94 20.955,27.951 v1(20.955,29.972) ; C7.2@82.423,7.112 82.561,7.25 C3.2@82.561,9.271 84.085,9.271 F1.2@84.836,8.52 v1(84.836,11.176)
  Bottom Layer w0.4: v1(12.446,11.43) 12.446,11.779 v1(21.59,20.923) 22.511,21.844 C19.1@28.564,21.844 28.613,21.844 v1(28.613,13.932)
  Bottom Layer w1: v1(20.955,29.972) 29.232,29.972 30.226,28.978 30.226,26.035 ; C19.1@28.564,21.844 28.564,23.611 30.226,25.273 30.226,26.035 ; v1(84.836,11.176) 82.688,11.176 C6.2@82.561,11.303 C5.2@82.561,13.208 C4.2@82.561,15.113 82.804,15.113 83.831,16.14 F5.2@83.831,17.272 83.831,20.69 76.835,27.686 66.548,27.686 66.04,27.178 F3.2@66.04,25.792 65.797,26.035 pad.84@38.735,26.035 30.226,26.035
3V3X: CX5.2 CX6.2 CX7.2 CX8.2 CX9.2 CX10.2 CX11.1 CX12.1 CX13.1 CX20.2 CX21.2 FX1.1 RX4.2 RX6.2 UX1.7 UX1.12 UX1.24 | length 57
  Top Layer w0.23: CX5.2@16.14,57.045 CX5.2@16.14,57.277
  Top Layer w0.3: CX7.2@16.209,61.468 v1(17.78,63.039) 18.471,63.73 UX1.7@18.471,64.614 18.471,65.715 19.304,66.548 19.304,68.199 ; UX1.24@17.171,70.514 17.171,68.935 17.907,68.199 19.304,68.199 ; UX1.12@21.721,64.614 21.721,67.56 21.082,68.199 v1(20.955,68.199) 19.304,68.199
  Top Layer w0.6: RX4.2@9.906,66.94 v1(9.906,68.326)
  Top Layer w1: CX5.2@16.14,57.277 CX7.2@16.14,61.457
  Bottom Layer w0.3: CX8.2@19.859,62.357 20.331,62.357 RX6.2@23.241,59.447
  Bottom Layer w0.6: v1(9.906,68.326) 13.843,64.389 CX9.2@19.801,64.389 ; v1(17.78,63.039) 19.594,63.039 19.801,63.246 ; v1(20.955,68.199) CX11.1@22.399,68.199 ; CX11.1@22.352,68.315 CX13.1@26.358,68.315
  Bottom Layer w1: 19.801,63.246 CX9.2@19.801,64.389 CX10.2@19.801,66.421 ; CX13.1@26.358,68.315 CX13.1@26.416,68.373 26.496,68.453 FX1.1@28.691,68.453 28.691,70.648 CX20.2@28.702,70.659 28.771,70.728 CX21.2@30.734,70.728
3V3XX: CX22.1 CX23.1 CX37.1 CX38.2 CX39.1 CX40.1 CX41.2 CX42.1 CX43.1 CX44.1 FXX1.1 RX14.2 RX15.2 UXX.5 UXX.12 UXX.17 UXX.19 UXX.20 UXX.29 UXX.41 UXX.52 UXX.64 | length 81.8
  Top Layer w0.229: v1(69.977,57.531) 69.98,57.528 UXX.12@71.467,57.528 74.171,57.528 ; v1(69.977,60.325) 69.979,60.327 72.769,60.327 74.041,59.055 ; 72.692,53.642 72.867,53.467 73.324,53.467 73.492,53.635 ; v1@73.023,61.672 v1(73.049,61.698) 74.065,61.698 74.538,61.225 74.538,59.552 74.041,59.055 ; UXX.19@73.492,54.703 73.492,53.635 ; v1(77.47,56.896) 76.708,56.896 76.073,57.531 74.171,57.531 ; 73.492,53.635 73.828,53.635 73.892,53.699 UXX.20@73.892,54.703 73.892,55.604 74.171,55.883 74.171,57.528 ; 74.041,59.055 74.171,58.925 74.171,57.531 ; 74.171,57.528 74.171,57.531
  Top Layer w0.23: CX38.2@72.136,52.208 72.136,53.086 72.692,53.642 UXX.17@72.692,54.703 ; UXX.64@72.692,63.153 72.692,62.055 v1(73.049,61.698) ; UXX.29@77.492,54.703 77.492,59.182 ; UXX.52@77.492,63.153 v1(77.492,61.722) 77.492,59.182 ; UXX.41@79.917,59.128 v1(78.359,59.128) 77.546,59.128 77.492,59.182
  Top Layer w0.381: 67.807,68.337 RX14.2@69.342,68.337
  Top Layer w0.6: RX14.2@69.342,68.337 69.342,69.723 70.104,70.485 72.898,70.485 v1(73.533,69.85) RX15.2@73.533,68.337
  Top Layer w0.61: CX38.2@72.136,52.208 70.75,52.208 70.358,51.816 70.358,48.712 73.996,45.074 CX42.1@74.168,45.074 CX43.1@76.2,45.074 76.523,44.751 CX44.1@78.232,44.751 79.847,44.751 FXX1.1@80.391,44.207
  Bottom Layer w0.6: v1(73.049,61.698) 74.422,63.071 74.422,68.961 v1(73.533,69.85)
  Bottom Layer w0.61: CX23.1@68.58,57.542 69.966,57.542 v1(69.977,57.531) ; CX22.1@68.58,60.314 69.966,60.314 v1(69.977,60.325) ; v1(77.47,56.896) 77.956,56.896 CX40.1@78.718,56.134 ; v1(77.492,61.722) CX41.2@78.729,61.722 ; v1(78.359,59.128) 79.545,59.128 CX39.1@79.618,59.055
3V3XXX: CX49.2 CX50.2 CX51.2 PXXX.2 UXX2.1 UXX2.2 UXX2.36 UXX2.37 UXX2.40 UXX2.41 | length 41.8
  Top Layer w0.229: PXXX.2@48.133,70.612 48.133,72.009 56.007,79.883 ; UXX2.2@50.193,83.07 UXX2.1@50.193,83.87 52.02,83.87 v1@54.293,81.597 ; UXX2.40@55.093,85.57 UXX2.41@54.293,85.57 v1@54.293,81.597 ; v1@57.493,81.534 UXX2.37@57.493,85.57 UXX2.36@58.293,85.57 58.293,82.143 57.607,81.458 57.582,81.458 56.007,79.883 ; v1@54.293,81.597 v1(54.356,81.534) 56.007,79.883
  Bottom Layer w0.381: CX51.2@53.595,80.646 53.595,80.772 v1(54.356,81.534)
  Bottom Layer w0.61: CX50.2@56.516,80.519 v1(57.531,81.534) 58.042,81.534 CX49.2@59.183,80.392
5VXXX: CX48.2 CX52.2 CX53.2 PXXX.3 UXX2.11 UXX2.12 UXX2.15 UXX2.16 UXX2.19 UXX2.20 | length 27.3
  Top Layer w0.381: UXX2.11@50.193,75.87 51.105,75.87 v1(52.578,77.343) ; PXXX.3@50.673,70.612 50.673,72.95 UXX2.12@51.893,74.17 51.893,74.88 53.213,76.2 v1(54.293,76.2) UXX2.15@54.293,74.17 UXX2.16@55.093,74.17 ; v1(57.493,76.2) UXX2.19@57.493,74.17 UXX2.20@58.293,74.17
  Bottom Layer w0.381: CX48.2@52.197,74.814 52.197,76.962 v1(52.578,77.343) 53.721,76.2 v1(54.293,76.2) ; CX52.2@54.483,74.814 54.293,75.004 v1(54.293,76.2) ; CX53.2@57.531,74.814 57.493,74.852 v1(57.493,76.2) v1(54.293,76.2)
8138+5V: *.3 CC22.2 CC23.2 FX2.2 | length 12.6
  Top Layer w0.6: *.3@22.593,53.721 v1(24.384,53.721)
  Bottom Layer w0.6: v1(24.384,53.721) 26.924,56.261 FX2.2@30.215,56.261
  Bottom Layer w1: CC23.2@30.146,60.198 30.215,60.129 CC22.2@30.215,58.166 FX2.2@30.215,56.261
8138-5V: *.6 CC24.2 CC25.2 FX3.1 | length 22.1
  Top Layer w0.6: v1(15.748,53.721) *.6@17.793,53.721
  Bottom Layer w0.6: v1(15.748,53.721) 18.415,51.054 FX3.1@30.342,51.054
  Bottom Layer w1: FX3.1@30.342,51.054 30.342,46.794 CC24.2@30.4,46.736
+5V: C8.2 C9.2 C10.2 C11.2 C12.2 F2.2 F4.1 | length 36.6
  Top Layer w1: v4(70.739,5.966) F4.1@70.739,7.101 ; v1(87.376,12.827) F2.2@87.376,8.52 88.127,9.271 C9.2@89.524,9.271 89.524,7.123 C8.2@89.535,7.112
  Bottom Layer w1: v4(70.739,5.966) 87.892,5.966 ; v1(87.376,12.827) 89.281,12.827 89.281,7.377 89.292,7.366 87.892,5.966 ; 87.855,5.929 87.892,5.966
_3V3_: "G G 3 5.3" F1.1 | length 2.5
  Top Layer w1: 84.836,4.191 F1.1@84.836,6.72
_+5V_: "G G 3 5.4" F2.1 | length 2.5
  Top Layer w1: 87.376,4.191 F2.1@87.376,6.72
_CLK: DATA2.15 UX5.8 | length 10.6
  Top Layer w0.23: UX5.8@25.057,76.962 25.057,82.207 26.924,84.074 DATA2.15@26.924,86.741
_CLK_A: DATA3.2 PK0.2 | length 14.5
  Top Layer w0.229: PK0.2@87.249,71.539 90.805,75.095 90.805,77.597 92.964,79.756 95.123,79.756 DATA3.2@96.393,78.486
_CLK_B: DATA3.29 PK6.8 | length 8.7
  Top Layer w0.229: PK6.8@87.249,47.93 92.253,42.926 DATA3.29@93.853,42.926
_D0: DATA2.16 UX5.6 | length 13.4
  Top Layer w0.23: UX5.6@24.257,76.962 24.257,83.439 25.654,84.836 25.654,88.011 DATA2.16@26.924,89.281
_D1: DATA2.13 UX5.4 | length 10.2
  Top Layer w0.23: UX5.4@23.457,76.962 23.457,85.814 DATA2.13@24.384,86.741
_D2: DATA2.14 UX5.2 | length 13
  Top Layer w0.23: UX5.2@22.657,76.962 22.657,85.776 23.114,86.233 23.114,88.011 DATA2.14@24.384,89.281
_D3: DATA2.11 UX4.8 | length 10
  Top Layer w0.23: UX4.8@21.412,76.962 21.412,84.404 21.844,84.836 DATA2.11@21.844,86.741
_D4: DATA2.12 UX4.6 | length 12.8
  Top Layer w0.23: UX4.6@20.612,76.962 20.612,88.049 DATA2.12@21.844,89.281
_D5: DATA2.9 UX4.4 | length 10
  Top Layer w0.23: DATA2.9@19.304,86.741 19.304,84.836 19.812,84.328 UX4.4@19.812,76.962
_D6: DATA2.10 UX4.2 | length 13.3
  Top Layer w0.23: UX4.2@19.012,76.962 19.012,83.731 18.034,84.709 18.034,88.011 DATA2.10@19.304,89.281
_D7: DATA2.7 UX3.8 | length 10.2
  Top Layer w0.23: DATA2.7@16.764,86.741 16.764,84.963 17.856,83.871 UX3.8@17.856,76.962
_D8: DATA2.8 UX3.6 | length 13.4
  Top Layer w0.23: DATA2.8@16.764,89.281 15.621,88.138 15.621,84.709 17.056,83.274 UX3.6@17.056,76.962
_D9: DATA2.3 UX3.4 | length 11.7
  Top Layer w0.23: DATA2.3@11.684,86.741 16.256,82.169 UX3.4@16.256,76.962
_D10: DATA2.4 UX3.2 | length 14.8
  Top Layer w0.23: DATA2.4@11.684,89.281 10.541,88.138 10.541,84.963 15.456,80.048 UX3.2@15.456,76.962
_D11: DATA2.1 UX2.8 | length 11.9
  Top Layer w0.23: DATA2.1@9.144,86.741 9.144,84.836 14.338,79.642 UX2.8@14.338,76.962
_DAXX0: DATA3.13 PK3.4 | length 7.9
  Top Layer w0.229: PK3.4@87.249,60.198 88.773,60.198 91.821,63.246 DATA3.13@93.853,63.246
_DAXX1: DATA3.14 PK3.2 | length 11.3
  Top Layer w0.229: PK3.2@87.356,61.105 PK3.2@87.249,60.998 88.43,60.998 91.948,64.516 95.123,64.516 DATA3.14@96.393,63.246
_DAXX2: DATA3.11 PK2.8 | length 8.1
  Top Layer w0.229: PK2.8@87.249,62.065 88.481,62.065 92.202,65.786 DATA3.11@93.853,65.786
_DAXX3: DATA3.12 PK2.6 | length 11.3
  Top Layer w0.229: PK2.6@87.249,62.865 88.519,62.865 92.583,66.929 95.25,66.929 DATA3.12@96.393,65.786
_DAXX4: DATA3.9 PK2.4 | length 8.5
  Top Layer w0.229: PK2.4@87.249,63.665 88.43,63.665 93.091,68.326 DATA3.9@93.853,68.326
_DAXX5: DATA3.10 PK2.2 | length 11.7
  Top Layer w0.229: PK2.2@87.249,64.465 88.341,64.465 93.345,69.469 95.25,69.469 DATA3.10@96.393,68.326
_DAXX6: DATA3.7 PK1.8 | length 8.8
  Top Layer w0.229: PK1.8@87.249,65.583 88.57,65.583 DATA3.7@93.853,70.866
_DAXX7: DATA3.8 PK1.6 | length 12.7
  Top Layer w0.229: PK1.6@87.249,66.383 88.735,66.383 92.583,70.231 92.583,71.374 93.345,72.136 95.123,72.136 DATA3.8@96.393,70.866
_DAXX8: DATA3.5 PK1.4 | length 9.9
  Top Layer w0.229: PK1.4@87.249,67.183 88.265,67.183 91.821,70.739 91.821,72.009 93.218,73.406 DATA3.5@93.853,73.406
_DAXX9: DATA3.6 PK1.2 | length 13
  Top Layer w0.229: PK1.2@87.249,67.983 87.795,67.983 91.186,71.374 91.186,72.263 93.599,74.676 95.123,74.676 DATA3.6@96.393,73.406
_DAXX10: DATA3.3 PK0.8 | length 10.1
  Top Layer w0.229: PK0.8@87.249,69.139 88.189,69.139 90.787,71.737 90.787,72.611 93.853,75.677 DATA3.3@93.853,75.946
_DAXX11: DATA3.4 PK0.6 | length 13.7
  Top Layer w0.229: PK0.6@87.249,69.939 87.973,69.939 90.297,72.263 90.297,72.771 92.329,74.803 92.329,76.2 93.218,77.089 95.25,77.089 DATA3.4@96.393,75.946
_DBXX0: DATA3.30 PK6.6 | length 11.5
  Top Layer w0.229: PK6.6@87.249,48.73 88.684,48.73 93.345,44.069 95.25,44.069 DATA3.30@96.393,42.926
_DBXX1: DATA3.27 PK6.4 | length 8.3
  Top Layer w0.229: PK6.4@87.249,49.53 89.789,49.53 DATA3.27@93.853,45.466
_DBXX2: DATA3.28 PK6.2 | length 11.2
  Top Layer w0.229: PK6.2@87.249,50.33 89.878,50.33 93.472,46.736 95.123,46.736 DATA3.28@96.393,45.466
_DBXX3: DATA3.25 PK5.8 | length 8
  Top Layer w0.229: PK5.8@87.249,51.486 90.373,51.486 DATA3.25@93.853,48.006
_DBXX4: DATA3.26 PK5.6 | length 10.9
  Top Layer w0.229: PK5.6@87.249,52.286 90.335,52.286 93.345,49.276 95.123,49.276 DATA3.26@96.393,48.006
_DBXX5: DATA3.23 PK5.4 | length 7.7
  Top Layer w0.229: PK5.4@87.249,53.086 91.313,53.086 DATA3.23@93.853,50.546
_DBXX6: DATA3.24 PK5.2 | length 10.5
  Top Layer w0.229: PK5.2@87.249,53.886 91.275,53.886 93.345,51.816 95.123,51.816 DATA3.24@96.393,50.546
_DBXX7: DATA3.21 PK4.8 | length 7.4
  Top Layer w0.229: PK4.8@87.249,55.042 91.897,55.042 DATA3.21@93.853,53.086
_DBXX8: DATA3.22 PK4.6 | length 10.3
  Top Layer w0.229: PK4.6@87.249,55.842 91.859,55.842 93.345,54.356 95.123,54.356 DATA3.22@96.393,53.086
_DBXX9: DATA3.17 PK4.4 | length 7.2
  Top Layer w0.229: PK4.4@87.249,56.642 92.329,56.642 DATA3.17@93.853,58.166
_DBXX10: DATA3.18 PK4.2 | length 10.5
  Top Layer w0.229: PK4.2@87.249,57.442 90.081,57.442 92.075,59.436 95.123,59.436 DATA3.18@96.393,58.166
_DBXX11: DATA3.15 PK3.8 | length 7.5
  Top Layer w0.229: PK3.8@87.249,58.598 89.713,58.598 91.821,60.706 DATA3.15@93.853,60.706
_OTR: DATA2.2 UX2.6 | length 15.2
  Top Layer w0.23: DATA2.2@9.144,89.281 7.874,88.011 7.874,83.079 13.353,77.6 13.353,77.147 UX2.6@13.538,76.962
_OTR_A: DATA3.1 PK0.4 | length 11.9
  Top Layer w0.229: PK0.4@87.659,70.739 PK0.4@87.249,70.739 87.465,70.955 87.875,70.955 91.567,74.647 91.567,77.47 92.583,78.486 DATA3.1@93.853,78.486
_OTR_B: DATA3.16 PK3.6 | length 10.6
  Top Layer w0.229: PK3.6@87.249,59.398 89.497,59.398 91.948,61.849 95.25,61.849 DATA3.16@96.393,60.706
A\I\N\: C37.1 R4.2 U1.12 | length 7.5
  Top Layer w0.23: C37.1@60.209,13.97 U1.12@67.691,13.97
AD9235_CLK: UX1.13 UX5.7 | length 11.7
  Top Layer w0.23: UX1.13@22.371,64.614 22.371,67.456 25.057,70.142 UX5.7@25.057,75.184
ADC_CLK: DATA.1 Rx.2 | length 39.9
  Top Layer w1: Rx.2@57.034,31.115 65.027,31.115 65.278,31.115 ; 70.612,35.814 DATA.1@93.98,35.814
  Top Layer w1.013: 65.024,31.115 ccw(c65.024,33.02) 65.027,31.115 ccw(c65.024,33.02) 66.929,33.02 ; 66.919,33.153 cw(c69.469,33.274) 69.215,35.814 70.612,35.814
AIN: C36.1 R3.2 U1.11 | length 8.6
  Top Layer w0.23: C36.1@60.209,15.875 64.516,15.875 65.771,14.62 U1.11@67.691,14.62
  Bottom Layer w0.6: R3.2@62.865,15.251 v1(62.865,15.875)
CK6640: DATA4.1 UXX2.3 | length 21
  Top Layer w0.229: UXX2.3@50.193,82.27 51.842,82.27 v1(52.451,81.661)
  Bottom Layer w0.229: v1(52.451,81.661) 52.451,84.074 53.467,85.09 65.913,85.09 DATA4.1@67.437,83.566
CLK_A: PK0.1 RX26.2 UXX.63 | length 22.7
  Top Layer w0.229: UXX.63@73.092,63.153 73.092,64.195
  Top Layer w0.23: v1(72.771,64.516) 73.092,64.195
  Top Layer w0.6: RX26.2@71.501,68.337 v1(71.501,69.342) ; v1(83.947,71.501) 83.985,71.539 PK0.1@85.471,71.539
  Bottom Layer w0.6: v1(72.771,64.516) 71.501,65.786 v1(71.501,69.342) 73.66,71.501 v1(83.947,71.501)
CLK_B: PK6.7 UXX.18 | length 17.2
  Top Layer w0.229: UXX.18@73.092,54.703 73.092,55.82 v1(73.533,56.261)
  Top Layer w0.61: v1(83.947,47.879) 83.998,47.93 PK6.7@85.471,47.93
  Bottom Layer w0.61: v1(73.533,56.261) 81.915,47.879 v1(83.947,47.879)
D0: DATA.19 RP4.6 | length 7.8
  Top Layer w0.23: RP4.6@88.011,17.399 89.535,17.399 DATA.19@93.98,12.954
D1: DATA.18 RP4.4 | length 10.6
  Top Layer w0.23: RP4.4@88.011,18.199 89.624,18.199 93.472,14.351 95.377,14.351 DATA.18@96.52,15.494
D2: DATA.17 RP4.2 | length 7.4
  Top Layer w0.23: RP4.2@88.011,18.999 90.475,18.999 DATA.17@93.98,15.494
D3: DATA.16 RP3.8 | length 10.5
  Top Layer w0.23: RP3.8@88.011,20.244 89.992,20.244 93.472,16.764 95.25,16.764 DATA.16@96.52,18.034
D4: DATA.15 RP3.6 | length 7.2
  Top Layer w0.23: RP3.6@88.011,21.044 90.97,21.044 DATA.15@93.98,18.034
D5: DATA.14 RP3.4 | length 10.1
  Top Layer w0.23: RP3.4@88.011,21.844 91.059,21.844 93.599,19.304 95.25,19.304 DATA.14@96.52,20.574
D6: DATA.13 RP3.2 | length 6.8
  Top Layer w0.23: RP3.2@88.011,22.644 91.91,22.644 DATA.13@93.98,20.574
D7: DATA.12 RP2.8 | length 9.8
  Top Layer w0.23: RP2.8@88.011,23.838 91.605,23.838 93.472,21.971 95.377,21.971 DATA.12@96.52,23.114
D8: DATA.11 RP2.6 | length 6.6
  Top Layer w0.23: RP2.6@88.011,24.638 92.456,24.638 DATA.11@93.98,23.114
D9: DATA.8 RP2.4 | length 9.7
  Top Layer w0.23: RP2.4@88.011,25.438 92.113,25.438 93.726,27.051 95.377,27.051 DATA.8@96.52,28.194
D10: DATA.7 RP2.2 | length 6.8
  Top Layer w0.23: RP2.2@88.011,26.238 92.024,26.238 DATA.7@93.98,28.194
D11: DATA.6 RP1.8 | length 9.9
  Top Layer w0.23: RP1.8@88.011,27.394 91.529,27.394 93.599,29.464 95.25,29.464 DATA.6@96.52,30.734
D12: DATA.5 RP1.6 | length 7
  Top Layer w0.23: RP1.6@88.011,28.194 91.44,28.194 DATA.5@93.98,30.734
D13: DATA.4 RP1.4 | length 10.3
  Top Layer w0.23: RP1.4@88.011,28.994 90.335,28.994 93.345,32.004 95.25,32.004 DATA.4@96.52,33.274
DAXX0: PK3.3 UXX.44 | length 5.6
  Top Layer w0.229: UXX.44@79.917,60.328 84.198,60.328 84.328,60.198 PK3.3@85.471,60.198
DAXX1: PK3.1 UXX.45 | length 5.7
  Top Layer w0.229: UXX.45@79.917,60.728 84.096,60.728 84.366,60.998 PK3.1@85.471,60.998
DAXX2: PK2.7 UXX.46 | length 5.9
  Top Layer w0.229: UXX.46@79.917,61.128 83.353,61.128 84.29,62.065 PK2.7@85.471,62.065
DAXX3: PK2.5 UXX.47 | length 6.1
  Top Layer w0.229: UXX.47@79.917,61.528 83.118,61.528 84.455,62.865 PK2.5@85.471,62.865
DAXX4: PK2.3 UXX.48 | length 6.3
  Top Layer w0.229: UXX.48@79.917,61.928 82.629,61.928 84.366,63.665 PK2.3@85.471,63.665
DAXX5: PK2.1 UXX.49 | length 7.3
  Top Layer w0.229: UXX.49@78.692,63.153 83.092,63.153 84.404,64.465 PK2.1@85.471,64.465